# Altium PCB Tele.PcbDoc
Units mm, origin at the board's own origin, x right, y up, seen from the top; angles counter-clockwise.
Board outline 120 x 50 mm, 2 copper layers (Top Layer, Bottom Layer); 39 components, 47 nets, 209 pads, 64 vias.
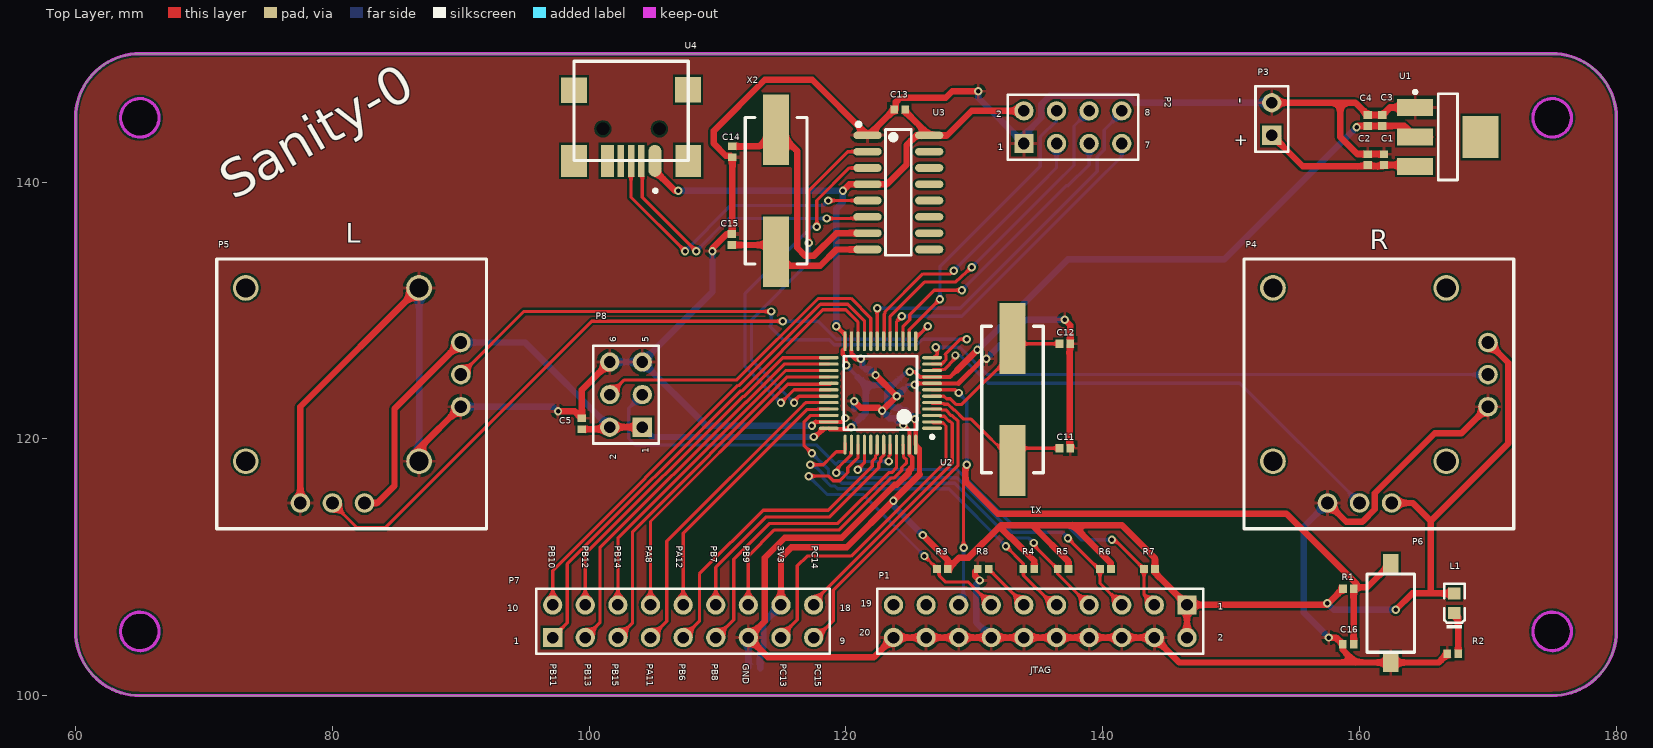
[diagram p0: Top Layer view]
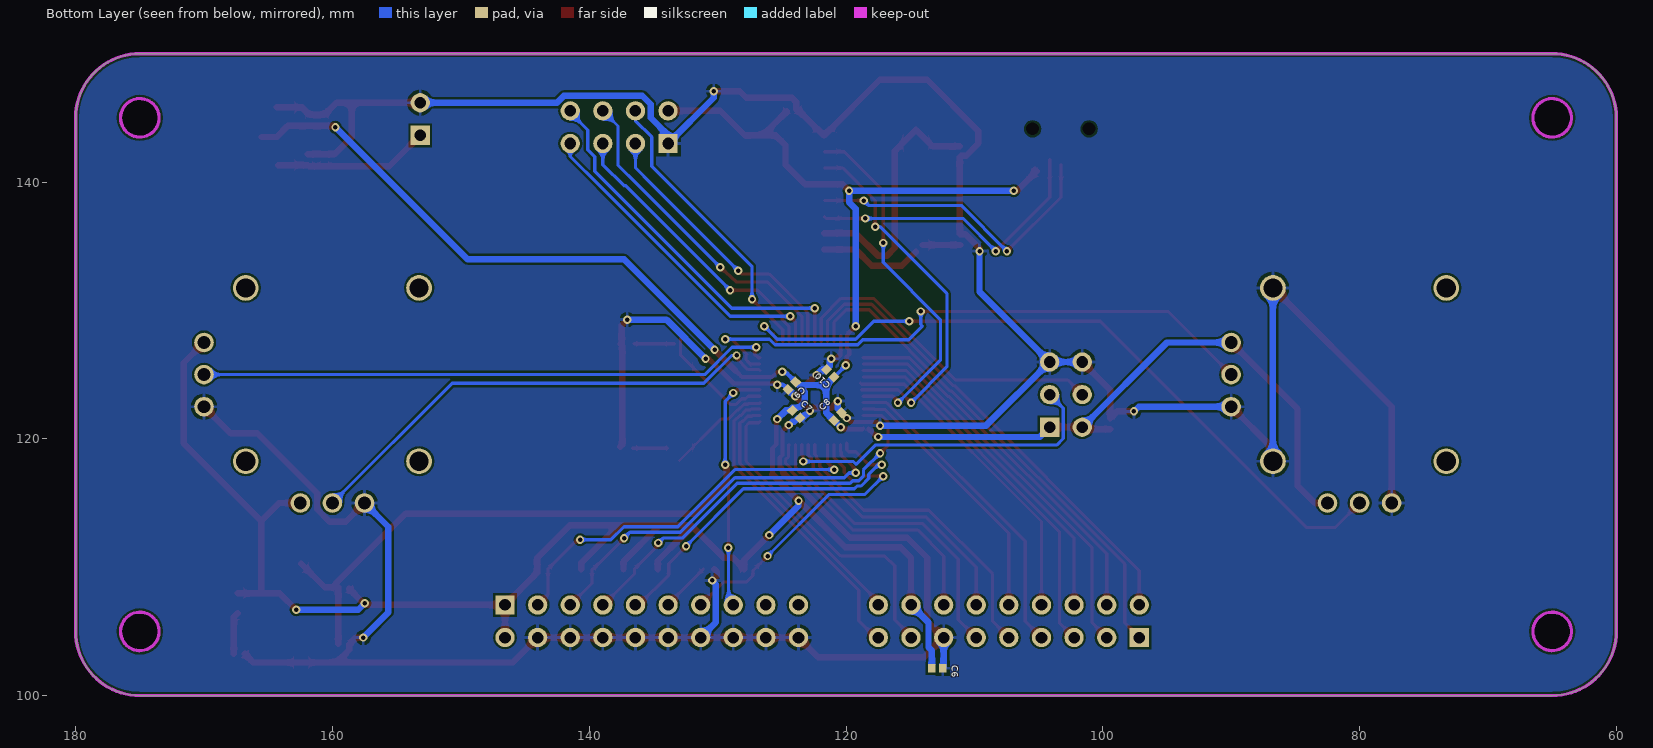
[diagram p1: Bottom Layer view, seen from below]

## Layer stack, top to bottom
Top Solder: solder mask 0.0102, Solder Resist, Dk 3.5
Top Layer: signal copper 0.0356
Dielectric 1: dielectric 0.32, FR-4, Dk 4.8
Bottom Layer: signal copper 0.0356
Bottom Solder: solder mask 0.0102, Solder Resist, Dk 3.5

## Board outline
60,105 60,145 cw(c65,145) 65,150 175,150 cw(c175,145) 180,145 180,105 cw(c175,105) 175,100 65,100 cw(c65,105)
cut-out: 173.5,105 ccw(c175,105) 175,103.5 ccw(c175,105) 176.5,105 ccw(c175,105) 175,106.5 ccw(c175,105)
cut-out: 173.5,145 ccw(c175,145) 175,143.5 ccw(c175,145) 176.5,145 ccw(c175,145) 175,146.5 ccw(c175,145)
cut-out: 65,143.5 cw(c65,145) 63.5,145 cw(c65,145) 65,146.5 cw(c65,145) 66.5,145 cw(c65,145)
cut-out: 65,103.5 cw(c65,105) 63.5,105 cw(c65,105) 65,106.5 cw(c65,105) 66.5,105 cw(c65,105)

## Design rules (kind name [scope] priority, off if disabled: settings)
Clearance Clearance_1 [InPolygon] p1: gap=0.16
Clearance [All] p2: gap=0.16
PolygonConnect [All] p1: connectstyle=Relief reliefconductorwidth=0.254 reliefentries=4 polygonreliefangle="90 Angle" airgapwidth=0.254
RoutingVias [All] p1: holewidth=0.711 width=1.27 viastyle="Through Hole" minholewidth=0.711 minwidth=1.27 maxholewidth=0.711 maxwidth=1.27
SolderMaskExpansion [All] p1: expansion=0.102
Width [InNet('GND')] p1: maxlimit=0.5 minlimit=0.25 preferedwidth=0.5 minimp=50.000000 maximp=50.000000 favimp=50.000000
30 further rules are at their usual default settings.

## Components (designator, comment, footprint, x,y, rotation, side; value= is the part's Value field where it differs from the comment)
C1 "106" LC-0402 162.306,140.97 r90 top
C2 "104" LC-0402 161.036,140.97 r90 top
C3 "104" LC-0402 162.179,144.018 r90 top
C4 "106" LC-0402 161.036,144.018 r90 top
C5 "0.1uF" LC-0402 99.822,120.396 r90 top
C6 "104" LC-0402 113.665,101.727 r180 bottom
C7 "104" LC-0402 124.714,122.174 r225 bottom
C8 "104" LC-0402 120.904,120.904 r135 bottom
C9 "104" LC-0402 123.952,124.968 r315 bottom
C10 "104" LC-0402 120.396,124.841 r45 bottom
C11 "22pF" LC-0402 136.271,118.872 r0 top
C12 "22pF" LC-0402 136.271,127 r0 top
C13 "0.1uF" LC-0402 124.968,146.05 r180 top
C14 "22pF" LC-0402 110.744,143.129 r270 top
C15 "22pF" LC-0402 111.506,134.747 r90 top
C16 "104" LC-0402 159.893,104.394 r180 top
L1 "LED" 0603_LED_S1 167.386,107.188 r90 top
P1 "AUX" HDR2X9_CEN 97.155,104.521 r0 top
P2 "nRF24L01-Module" HDR2X4 133.858,143.002 r0 top
P3 "POWER" HDR1X2 153.162,143.637 r90 top
P4 "stick" Stick 160,125 r0 top
P5 "stick" Stick 80,125 r0 top
P6 "ResetKey" ResetKeyC5382 162.433,106.426 r90 top
P7 "JTAG" HDR2X10 146.558,107.061 r180 top
P8 "STSRT_UP" HDR2X3 104.14,120.904 r90 top
R1 "10K" Res-0402 159.131,108.331 r180 top
R2 "Res-0402" Res-0402 167.259,103.251 r0 top
R3 "10K" Res-0402 127.508,109.855 r0 top
R4 "10K" Res-0402 134.239,109.855 r0 top
R5 "10K" Res-0402 136.906,109.855 r0 top
R6 "10K" Res-0402 140.208,109.855 r0 top
R7 "10K" Res-0402 143.637,109.855 r0 top
R8 "4.7K" Res-0402 130.683,109.855 r0 top
U1 "AMS1117" AMS1117 166.878,143.51 r0 top
U2 "STM32F103C8T6" STM-LQFP48_L 122.682,123.571 r180 top
U3 "CH340G" LC-SOP-16_150mil 124.079,139.192 r270 top
U4 "miniUSB" miniUSB 104.14,145.796 r270 top
X1 "8M" LC-HC-49SMD 132.969,123.063 r270 top
X2 "12M" LC-HC-49SMD 114.554,139.319 r90 top

## Footprints (in the part's own frame and the unit in brackets; to place one, negate y for a bottom-side part, rotate by r counter-clockwise, add the part's x,y. Pads: shape width x height; smd on the part's side, far side on the other; paste and mask are expansions set on the pad)
0603_LED_S1 [mm]
  rect 0.93x0.98 smd: N(-0.77,0) P(0.77,0)
  silkscreen extent -1.98,-0.79 1.53,0.79, body extent -0.8,-0.4 0.8,0.4, height 0.6
AMS1117 [mm]
  rect 2.8x1.3 smd: 1(-2.55,2.3) 2(-2.55,0) 3(-2.55,-2.3)
  rect 2.8x3.3 smd: ""(2.55,0)
  Top Overlay keep-out lines w0.2: -0.75,-3.35 -0.75,3.35 0.75,3.35 0.75,-3.35 -0.75,-3.35
  silkscreen extent -2.67,-3.35 0.75,3.62
HDR1X2 [mm] "Connector; Header; 2 Position"
  rect 1.5x1.5 hole 0.9: 1(0,0)
  round 1.5 hole 0.9: 2(2.54,0)
  silkscreen extent -1.27,-1.27 3.81,1.27
HDR2X3 [mm] "Connector; Header; 3x2 Position"
  rect 1.5x1.5 hole 0.9: 1(0,0)
  round 1.5 hole 0.9: 2(0,2.54) 3(2.54,0) 4(2.54,2.54) 5(5.08,0) 6(5.08,2.54)
  silkscreen extent -1.27,-1.27 6.35,3.81
HDR2X4 [mm] "Connector; Header; 4x2 Position"
  rect 1.5x1.5 hole 0.9: 1(0,0)
  round 1.5 hole 0.9: 2(0,2.54) 3(2.54,0) 4(2.54,2.54) 5(5.08,0) 6(5.08,2.54) 7(7.62,0) 8(7.62,2.54)
  silkscreen extent -1.27,-1.27 8.89,3.81
HDR2X9_CEN [mm] "Connector; Header; 9x2 Position"
  rect 1.5x1.5 hole 0.9: 1(0,0)
  round 1.5 hole 0.9: 2(2.54,0) 3(5.08,0) 4(7.62,0) 5(10.16,0) 6(12.7,0) 7(15.24,0) 8(17.78,0) 9(20.32,0) 10(0,2.54) 11(2.54,2.54) 12(5.08,2.54) 13(7.62,2.54) 14(10.16,2.54) 15(12.7,2.54) 16(15.24,2.54) 17(17.78,2.54) 18(20.32,2.54)
  silkscreen extent -1.27,-1.27 21.59,3.81
HDR2X10 [mm] "Connector; Header; 10x2 Position"
  rect 1.5x1.5 hole 0.9: 1(0,0)
  round 1.5 hole 0.9: 2(0,2.54) 3(2.54,0) 4(2.54,2.54) 5(5.08,0) 6(5.08,2.54) 7(7.62,0) 8(7.62,2.54) 9(10.16,0) 10(10.16,2.54) 11(12.7,0) 12(12.7,2.54) 13(15.24,0) 14(15.24,2.54) 15(17.78,0) 16(17.78,2.54) 17(20.32,0) 18(20.32,2.54) 19(22.86,0) 20(22.86,2.54)
  silkscreen extent -1.27,-1.27 24.13,3.81
LC-0402 [mm]
  rect 0.6x0.65 smd mask+0.051: 0(1.2,0.4) 1(0.35,0.4)
LC-HC-49SMD [mm]
  rect 5.5x2 smd: 0(4.75,0) 1(-4.75,0)
  silkscreen extent -5.7,-2.4 5.7,2.4, body extent -6.7,-2.46 6.7,2.44, height 4
LC-SOP-16_150mil [mm]
  oval 0.6x2.2 smd: 1(-4.445,-2.4) 2(-3.175,-2.4) 3(-1.905,-2.4) 4(-0.635,-2.4) 5(0.635,-2.4) 6(1.905,-2.4) 7(3.175,-2.4) 8(4.445,-2.4) 9(4.445,2.4) 10(3.175,2.4) 11(1.905,2.4) 12(0.635,2.4) 13(-0.635,2.4) 14(-1.905,2.4) 15(-3.175,2.4) 16(-4.445,2.4)
  silkscreen extent -5.45,-3.25 4.9,1
miniUSB [mm]
  oval 2.5x1 smd: 1(4.149,0.975)
  rect 2.5x0.5 smd: 2(4.149,-0.075) 3(4.149,-0.875) 4(4.149,-1.675)
  rect 2.5x1 smd: 5(4.149,-2.725)
  rect 2x2 smd: 6(-1.397,3.556) 6(-1.351,-5.325)
  rect 2.5x2 smd: 6(4.149,3.575) 6(4.149,-5.325)
  round 0 hole 1: ""(1.649,1.325) ""(1.649,-3.075)
  Top Overlay keep-out lines w0.254: -3.601,-4.553 -3.601,3.575 4.124,3.575 4.124,-5.325 -1.351,-5.325 -3.601,-5.325 -3.601,-4.275
  silkscreen extent -3.6,-5.33 6.6,3.57
Res-0402 [mm]
  rect 0.6x0.65 smd mask+0.051: 0(0.425,0) 1(-0.425,0)
ResetKeyC5382 [mm]
  rect 1.5x1.2 smd: 0(-3.85,0) 1(3.85,0)
  silkscreen extent -3.05,-1.85 3.05,1.85
Stick [mm]
  round 1.524 hole 1: 1(10,2.5) 2(10,0) 3(10,-2.5) 4(-2.5,-10) 5(0,-10) 6(2.5,-10)
  round 2 hole 1.5: ""(-6.75,-6.75) ""(-6.75,6.75) ""(6.75,-6.75) ""(6.75,6.75)
  silkscreen extent -9,-12 12,9
STM-LQFP48_L [mm] "QFP, 48-Leads, Body 7x7mm, Pitch 0.5mm, IPC High Density"
  oval 1.55x0.25 smd: 1(-4.025,2.75) 2(-4.025,2.25) 3(-4.025,1.75) 4(-4.025,1.25) 5(-4.025,0.75) 6(-4.025,0.25) 7(-4.025,-0.25) 8(-4.025,-0.75) 9(-4.025,-1.25) 10(-4.025,-1.75) 11(-4.025,-2.25) 12(-4.025,-2.75) 25(4.025,-2.75) 26(4.025,-2.25) 27(4.025,-1.75) 28(4.025,-1.25) 29(4.025,-0.75) 30(4.025,-0.25) 31(4.025,0.25) 32(4.025,0.75) 33(4.025,1.25) 34(4.025,1.75) 35(4.025,2.25) 36(4.025,2.75)
  oval 0.25x1.55 smd: 13(-2.75,-4.025) 14(-2.25,-4.025) 15(-1.75,-4.025) 16(-1.25,-4.025) 17(-0.75,-4.025) 18(-0.25,-4.025) 19(0.25,-4.025) 20(0.75,-4.025) 21(1.25,-4.025) 22(1.75,-4.025) 23(2.25,-4.025) 24(2.75,-4.025) 37(2.75,4.025) 38(2.25,4.025) 39(1.75,4.025) 40(1.25,4.025) 41(0.75,4.025) 42(0.25,4.025) 43(-0.25,4.025) 44(-0.75,4.025) 45(-1.25,4.025) 46(-1.75,4.025) 47(-2.25,4.025) 48(-2.75,4.025)
  silkscreen extent -4.15,-2.85 2.85,3.55, body extent -3.5,-3.5 3.5,3.5, height 1.6

## Part data
C1 C2 C3 C4 C5 C6 C7 C8 C9 C10 C11 C12 C13 C14 C15 C16: library part Cap-0402
P1: library part "Header 9X2A", "Header, 9-Pin, Dual row"
P2: library part "Header 4X2", "Header, 4-Pin, Dual row"
P3: library part "Header 2", "Header, 2-Pin"
P6: library part ResetKey_C5382
P7: library part "Header 10X2", "Header, 10-Pin, Dual row"
P8: library part "Header 3X2", "Header, 3-Pin, Dual row"
R1 R3 R4 R5 R6 R7 R8: library part Res-0402
U2: "ARM Cortex-M3 32-bit MCU, 64 KB Flash, 20 KB Internal RAM, 37 I/Os, 48-pin LQFP, -40 to 85 degC, Tray"
X1 X2: library part 49SMD

## Via types
v1: diameter 0.65, hole 0.35, Top Layer to Bottom Layer, tented both sides, 64 vias

## Nets (pads, with @x,y where several pads share a name; then routed paths per layer and width w, separated by ;. In a path a pad name is that pad's centre, name@x,y a point inside that pad or via, vN(x,y) a via of type N, cw(c..) or ccw(c..) an arc to the next point about the centre after c; other vN are vias at no path point)
3.7V-LIPO2S: C1.1 C2.1 P3.1 U1.3 | length 12
  Top Layer w0.5: P3.1 155.575,141.224 C1.1@161.81,141.224 ; C1.1 U1.3@164.218,141.32
3V3: C3.1 C4.1 C5.1 C6.1 C7.1 C8.1 C9.1 C10.1 C13.1 L1.P P1.17 P2.2 P4.1 P4.6 P5.1 P5.6 P7.1 P7.2 P8.1 P8.2 R1.0 R3.0 R4.0 R5.0 R6.0 R7.0 U1.2 U2.9 U2.24 U2.36 U2.48 U3.4 U3.16 U4.1 | length 287.4
  Top Layer w0.3: U2.36 U2.36@118.721,120.757 ; v1(119.253,128.778) 119.932,128.099 U2.24 119.932,127.088 119.761,126.917 ; 119.761,126.575 119.932,126.404 ; v1@120.249,120.757 v1@120.313,120.821 ; v1(124.968,125.222) 125.349,125.222 125.75,124.821 U2.9 128.123,124.821 128.651,125.349
  Top Layer w0.32: v1(125.349,121.539) 125.432,121.456 U2.48 125.73,119.248
  Top Layer w0.35: v1(117.475,120.142) 117.602,120.142 U2.36@118.237,120.777 ; U2.36@118.721,120.757 v1@120.249,120.757 ; 119.761,126.575 119.761,126.917 ; v1@119.932,125.813 119.932,126.404
  Top Layer w0.4: 125.73,117.221 125.73,119.248
  Top Layer w0.5: P5.6 83.5,115 84.836,116.336 84.836,122.336 P5.1 ; C5.1 101.442,120.746 P8.2 P8.1 ; U4.1@105.283,140.97 105.156,140.843 106.68,139.319 v1(106.934,139.319) ; P1.17 114.935,110.744 115.749,111.558 120.067,111.558 v1(123.698,115.189) 125.73,117.221 ; v1(119.761,139.319) 120.269,139.827 U3.4 123.19,139.827 124.714,141.351 124.714,142.875 125.476,143.637 U3.16 ; C13.1@124.618,145.498 U3.16 ; v1(125.984,112.508) 127.933,110.559 R3.0 128.829,110.751 129.547,110.751 131.953,113.157 ; 128.651,125.349 v1(130.238,126.936) ; P2.2 129.794,145.542 127.889,143.637 U3.16 ; 134.62,113.157 137.331,110.446 R5.0 ; R4.0 134.664,110.498 132.774,112.388 132.722,112.388 131.953,113.157 ; R6.0 140.633,110.319 137.668,113.284 ; P7.2 P7.1 ; R1.0 157.436,107.061 P7.1 ; v1@159.862,144.368 C4.1 C3.1 163.47,144.368 U1.2 U1.2@165.518,143.51 ; P4.6 164.146,115 165.481,113.665 ; v1(162.814,106.68) 164.092,107.958 L1.P ; 165.546,108.023 165.546,113.603 171.577,119.634 171.577,125.923 P4.1 ; 131.953,113.157 132.08,113.284 137.668,113.284 ; 137.668,113.284 141.478,113.284 144.062,110.7 R7.0 144.062,109.557 P7.1
  Bottom Layer w0.3: v1(120.015,125.73) 120.672,125.073 ; v1(120.396,120.904) C8.1@120.926,121.434 ; C9.1 124.701,125.222 v1(124.968,125.222)
  Bottom Layer w0.5: P5.1 95.004,127.5 P8.2 ; P8.1 104.902,120.142 v1(117.475,120.142) ; v1(106.934,139.319) 110.972,139.319 110.965,139.312 v1@119.754,139.312 ; C6.1 113.315,103.512 113.575,103.772 113.575,105.701 P1.17 ; v1(119.253,128.778) 119.253,137.922 119.761,138.43 v1(119.761,139.319) ; C10.1 121.539,124.193 ; C8.1 121.539,122.034 121.539,124.193 ; v1(123.698,115.189) 123.698,114.794 v1(125.984,112.508) ; C9.1 123.672,124.193 ; v1(125.349,121.539) 124.679,122.209 C7.1 124.184,122.435 123.788,122.435 123.743,122.48 123.594,122.48 123.197,122.877 123.197,123.63 123.317,123.75 123.317,123.838 123.672,124.193 ; v1(130.238,126.936) 137.287,133.985 149.479,133.985 v1(159.766,144.272) ; v1(157.48,107.188) 157.988,106.68 v1(162.814,106.68) ; 121.539,124.193 123.672,124.193
BOOT0: P8.3 U2.44 | length 26.4
  Top Layer w0.25: v1(123.317,118.237) 123.344,118.264 123.344,118.645 123.444,118.745 U2.44@123.444,119.534
  Bottom Layer w0.25: P8.3 103.085,122.389 103.085,120.028 103.601,119.512 117.724,119.512 119.213,118.023 119.421,118.232 119.502,118.232 119.507,118.237 v1(123.317,118.237)
BOOT1: P8.4 U2.20 | length 25.9
  Top Layer w0.25: P8.4 102.743,124.587 111.506,124.587 117.856,130.937 120.396,130.937 121.932,129.401 U2.20
CPU_RX: U2.31 U3.2 | length 28.6
  Top Layer w0.25: v1(115.951,122.809) 115.951,122.936 116.336,123.321 U2.31
  Top Layer w0.254: v1(117.094,135.255) 117.094,139.319 120.142,142.367 U3.2
  Bottom Layer w0.254: v1(115.951,122.809) 112.649,126.111 112.649,129.291 117.094,133.736 v1(117.094,135.255)
CPU_TX: U2.30 U3.3 | length 28.7
  Top Layer w0.25: v1(114.935,122.809) 115.947,123.821 U2.30@118.784,123.821
  Top Layer w0.254: v1(117.729,136.525) 117.729,138.562 120.264,141.097 U3.3
  Bottom Layer w0.254: v1(114.935,122.809) 112.141,125.603 112.141,131.323 117.343,136.525 v1(117.729,136.525)
D+: U3.5 U4.3 | length 24.3
  Top Layer w0.254: U4.3@103.251,141.351 103.251,138.835 v1(107.466,134.62) ; v1(118.618,138.557) U3.5
  Bottom Layer w0.254: v1(107.466,134.62) 111.022,138.176 118.237,138.176 v1(118.618,138.557)
D-: U3.6 U4.2 | length 23.3
  Top Layer w0.254: U4.2@104.14,141.732 104.14,138.811 v1(108.331,134.62) ; v1(118.491,137.16) 121.552,137.16 U3.6
  Bottom Layer w0.254: v1(108.331,134.62) 110.871,137.16 v1(118.491,137.16)
GND: C1.0 C2.0 C3.0 C4.0 C5.0 C6.0 C7.0 C8.0 C9.0 C10.0 C11.0 C12.0 C13.0 C14.0 C15.0 C16.0 P1.7 P2.1 P3.2 P4.3 P4.4 P5.3 P5.4 P5.@86.75,118.25 P5.@86.75,131.75 P6.0 P7.4 P7.6 P7.8 P7.10 P7.12 P7.14 P7.16 P7.18 P7.20 P8.5 P8.6 R2.1 R8.1 U1.1 U2.8 U2.23 U2.35 U2.47 U3.1 | length 330.7
  Top Layer w0.3: 117.638,121.321 U2.35 119.639,121.321 v1(119.937,121.619) ; U2.23@120.396,126.873 120.437,126.832 120.437,126.578 120.512,126.503 ; U2.23@120.412,126.873 U2.23@120.412,128.016 ; v1(125.349,124.206) 125.464,124.321 U2.8 128.766,124.321
  Top Layer w0.32: v1(124.46,121.071) 124.932,120.599 U2.47 124.952,119.526 124.952,118.747 125.161,118.538 125.161,117.795 125.095,117.729
  Top Layer w0.35: v1(117.348,121.031) 117.638,121.321
  Top Layer w0.4: 128.766,124.321 130.683,126.238 v1(130.937,126.238)
  Top Layer w0.45: 120.512,126.503 120.777,126.238 v1(121.158,126.238)
  Top Layer w0.5: P5.4 77.5,122.5 P5.@86.75,131.75 ; P5.@86.75,118.25 86.75,119.25 P5.3 ; v1(97.574,122.136) 98.882,122.136 C5.0 99.422,123.806 P8.6 ; v1(109.601,134.62) 109.601,134.837 110.711,135.947 C15.0 ; C15.0@111.144,135.985 C14.0 111.024,142.049 110.641,142.049 109.688,143.002 109.688,143.978 113.665,147.955 117.361,147.955 U3.1 ; v1(120.65,122.936) 121.158,122.428 122.555,122.428 v1(122.809,122.174) v1(123.952,123.317) v1(122.301,124.968) ; U3.1@121.755,143.637 C13.0 123.888,145.65 123.888,146.24 124.206,146.558 127.762,146.558 128.27,147.066 v1(130.302,147.066) ; 125.095,117.729 124.88,117.514 124.88,117.336 123.964,116.42 123.786,116.42 119.669,112.303 115.224,112.303 113.665,110.744 113.665,105.791 P1.7 113.919,102.997 122.174,102.997 P7.20 P7.18 P7.16 P7.14 P7.12 P7.10 P7.8 P7.6 P7.4 145.963,102.576 159.679,102.576 ; R8.1 130.048,109.645 130.048,109.347 v1(130.429,108.966) ; v1(137.033,129.286) 137.471,128.848 C12.0 ; C12.0@137.565,127.4 137.414,127.249 137.414,119.55 C11.0@137.572,119.392 ; P3.2 158.496,146.177 ; P4.4 158.962,113.538 160.224,113.538 161.192,114.506 161.192,115.768 165.862,120.438 167.938,120.438 P4.3 ; v1(157.607,104.521) 158.166,104.521 C16.0 158.693,103.562 159.679,102.576 ; C1.0 C2.0 159.836,142.17 158.496,143.51 158.496,146.177 ; U1.1 162.371,145.81 C3.0 C4.0 159.677,146.177 158.496,146.177 ; R2.1 166.159,102.576 P6.0 159.679,102.576
  Bottom Layer w0.3: C9.0 124.887,124.206 v1(125.349,124.206)
  Bottom Layer w0.35: v1@119.922,121.619 v1(119.937,121.619)
  Bottom Layer w0.5: P5.@86.75,118.25 P5.@86.75,131.75 ; P5.3 97.21,122.5 v1(97.574,122.136) ; P8.6 P8.5 ; v1(109.601,134.62) 109.601,131.445 P8.5 ; C6.0@112.395,102.197 P1.7 ; v1(117.348,121.031) 109.093,121.031 P8.5 ; 120.65,122.347 v1(120.65,122.936) ; v1(121.158,126.238) 121.273,126.123 121.273,125.661 ; C10.0 121.862,125.407 v1(122.301,124.968) ; v1(122.809,122.174) 123.375,121.608 C7.0 123.752,121.608 124.023,121.337 124.194,121.337 v1(124.46,121.071) ; v1(123.952,123.317) C9.0@124.472,123.837 ; v1(130.302,147.066) 130.302,146.558 P2.1 133.858,143.637 135.218,144.997 135.218,146.068 135.872,146.722 141.967,146.722 142.512,146.177 P3.2 ; v1(130.429,108.966) 130.138,108.675 130.138,105.701 P7.14 ; v1(130.937,126.238) 133.985,129.286 v1(137.033,129.286) ; P4.4 155.657,113.157 155.657,106.471 v1(157.607,104.521)
JNRST: P7.3 R7.1 U2.40 | length 30.8
  Top Layer w0.254: v1(120.904,117.602) 121.432,118.13 U2.40 ; v1(140.716,112.141) 140.926,112.141 R7.1 143.212,107.867 P7.3
  Bottom Layer w0.254: v1(120.904,117.602) 128.651,117.602 133.096,113.157 137.292,113.157 138.308,112.141 v1(140.716,112.141)
JTCK: P7.9 R4.1 U2.37 | length 28
  Top Layer w0.254: v1(117.221,117.983) 118.232,117.983 118.872,118.623 ; 118.938,118.679 119.258,118.999 119.785,118.999 119.932,119.146 U2.37@119.932,119.673 ; v1(132.461,111.633) 133.814,110.28 133.814,109.391 136.144,107.061 P7.9
  Bottom Layer w0.254: v1(117.221,117.983) 117.475,117.983 118.231,117.227 118.231,116.925 118.83,116.326 119.132,116.326 119.356,116.102 127.992,116.102 v1(132.461,111.633)
JTDI: P7.5 R6.1 U2.38 | length 29.8
  Top Layer w0.25: v1(119.253,117.348) 119.253,117.609 120.362,118.718 120.362,118.965 120.432,119.035 U2.38
  Top Layer w0.254: v1(137.287,112.268) 139.7,109.855 R6.1 139.783,108.756 P7.5
  Bottom Layer w0.254: v1(119.253,117.348) 119.761,117.348 120.139,116.97 128.648,116.97 132.895,112.723 136.832,112.723 v1(137.287,112.268)
JTDO: P7.13 R3.1 U2.39 | length 24.6
  Top Layer w0.25: v1(117.094,117.094) 118.644,117.094 119,116.738 119.506,116.738 120.142,117.374 120.142,117.756 120.745,118.359 120.772,118.359 120.932,118.519 U2.39 ; v1(126.111,110.871) R3.1@127.083,109.899 ; R3.1 R3.1@127.083,109.899 ; P7.13 129.54,108.839 127.762,108.839 127.254,109.347 127.254,109.728 R3.1@127.083,109.899
  Bottom Layer w0.25: v1(117.094,117.094) 118.518,115.67 121.312,115.67 v1(126.111,110.871)
JTMS: P7.7 R5.1 U2.34 | length 31.9
  Top Layer w0.25: v1(117.348,118.872) 116.718,119.502 116.718,121.292 117.247,121.821 U2.34 ; v1(134.62,111.887) 134.62,111.716 R5.1 136.481,109.47 P7.7@138.89,107.061
  Bottom Layer w0.25: v1(117.348,118.872) 117.348,118.87 118.643,117.575 118.643,117.095 119,116.738 119.48,116.738 119.68,116.538 128.469,116.538 132.739,112.268 134.239,112.268 v1(134.62,111.887)
LE: P5.2 U2.11 | length 47.4
  Top Layer w0.25: P5.2 94.921,129.921 v1(114.173,129.921) ; U2.11 127.465,125.821 127.787,126.143 127.787,126.499 127.715,126.572 127.715,126.574 128.903,127.762 v1(129.413,127.762)
  Bottom Layer w0.25: v1(114.173,129.921) 114.173,128.905 114.046,128.778 115.113,127.711 118.693,127.711 119.074,127.33 125.528,127.33 125.96,127.762 v1(129.413,127.762)
LR: P5.5 U2.13 | length 56.5
  Top Layer w0.25: P5.5 81.915,113.085 84.129,113.085 100.203,129.159
  Top Layer w0.254: 100.203,129.159 v1(115.062,129.159) ; U2.13 125.432,127.845 v1(126.365,128.778)
  Bottom Layer w0.254: v1(115.062,129.159) 117.856,129.159 119.253,127.762 119.888,127.762 ; 120.015,127.762 119.888,127.762 ; v1(126.365,128.778) 125.349,127.762 119.888,127.762
NetC11_1: C11.1 U2.5 X1.0 | length 10.9
  Top Layer w0.254: U2.5 126.707,122.759 127.574,122.759 127.646,122.687 127.943,122.687 128.382,122.248 128.45,122.248 129.159,121.539 129.743,121.539 X1.0 ; X1.0@133.928,119.272 C11.1
NetC12_1: C12.1 U2.6 X1.1 | length 12.4
  Top Layer w0.254: U2.6 127.626,123.321 127.826,123.121 128.123,123.121 128.562,122.682 129.032,122.682 132.898,126.548 X1.1@132.898,127.813 ; X1.1@133.382,127.4 C12.1@136.494,127.4
NetC14_1: C14.1 U3.7 X2.0 | length 20.3
  Top Layer w0.254: 117.472,134.242 117.475,134.239
  Top Layer w0.5: C14.1 113.264,142.779 X2.0 116.205,142.418 116.205,134.869 116.832,134.242 117.472,134.242 ; 117.475,134.239 119.253,136.017 U3.7
NetC15_1: C15.1 U3.8 X2.1 | length 11
  Top Layer w0.5: C15.1 X2.1@114.026,135.097 ; X2.1 115.646,133.477 117.983,133.477 119.253,134.747 U3.8
NetL1_N: L1.N R2.0 | length 3.3
  Top Layer w0.5: L1.N 167.684,106.12 R2.0
NetP7_11: P7.11 R8.0 | length 3.9
  Top Layer w0.25: R8.0 P7.11@133.858,107.105
NRST: C16.1 P6.1 P7.15 R1.1 U2.7 | length 62.4
  Top Layer w0.254: U2.7 126.711,123.825 128.524,123.825 v1(128.778,123.571) ; v1(129.159,111.506) 129.159,117.729 v1(129.413,117.983) 129.413,116.586
  Top Layer w0.5: 129.413,116.586 131.826,114.173 154.305,114.173 159.791,108.687 159.543,108.439 C16.1@159.543,104.026 ; R1.1@159.806,108.439 160.596,108.439 P6.1
  Bottom Layer w0.254: P7.15 129.159,107.442 v1(129.159,111.506) ; v1(128.778,123.571) 129.413,122.936 v1(129.413,117.983)
PA8: P1.13 U2.29 | length 25.1
  Top Layer w0.254: P1.13 104.775,113.559 115.469,124.253 118.792,124.253 U2.29@118.872,124.333
PA11: P1.4 U2.32 | length 25.1
  Top Layer w0.254: P1.4 106.045,105.791 106.045,112.014 116.081,122.05 116.086,122.05 116.71,122.674 116.71,122.679 116.852,122.821 U2.32
PA12: P1.14 U2.33 | length 20.9
  Top Layer w0.254: P1.14 107.315,112.649 116.941,122.275 117.758,122.275 117.804,122.321 U2.33
PB6: P1.5 U2.42 | length 24.3
  Top Layer w0.254: P1.5 108.585,105.791 108.585,109.474 113.538,114.427 118.623,114.427 122.047,117.851 122.047,118.237 122.291,118.481 122.291,118.662 122.428,118.799 U2.42@122.428,119.546
PB7: P1.15 U2.43 | length 20.8
  Top Layer w0.254: P1.15 109.855,109.982 113.792,113.919 118.729,113.919 122.555,117.745 122.555,118.11 122.705,118.26 122.705,118.49 122.932,118.717 U2.43
PB8: P1.6 U2.45 | length 24.1
  Top Layer w0.254: P1.6 111.252,105.918 111.252,110.617 114.046,113.411 119.36,113.411 123.32,117.371 123.57,117.371 123.929,117.73 123.929,117.98 123.932,117.983 U2.45
PB9: P1.16 U2.46 | length 20.8
  Top Layer w0.254: P1.16 112.395,110.871 114.427,112.903 119.481,112.903 123.535,116.957 123.742,116.957 124.343,117.558 124.343,117.765 124.714,118.136 124.714,118.353 124.485,118.582 124.485,119.493 U2.46
PB10: P1.10 U2.21 | length 37.7
  Top Layer w0.254: P1.10 97.155,109.728 111.582,124.155 111.685,124.155 118.012,130.482 120.143,130.482 121.432,129.193 U2.21
PB11: P1.1 U2.22 | length 38.9
  Top Layer w0.254: P1.1 98.298,105.664 98.298,110.257 111.762,123.721 111.865,123.721 118.192,130.048 119.991,130.048 120.932,129.107 U2.22
PB12: P1.11 U2.25 | length 29.3
  Top Layer w0.254: P1.11 99.695,111.04 111.942,123.287 112.044,123.287 115.078,126.321 U2.25
PB13: P1.2 U2.26 | length 31.2
  Top Layer w0.254: P1.2 100.838,105.664 100.838,111.506 112.185,122.853 112.224,122.853 115.192,125.821 U2.26
PB14: P1.12 U2.27 | length 27
  Top Layer w0.254: P1.12 102.235,112.268 112.386,122.419 112.404,122.419 115.306,125.321 U2.27
PB15: P1.3 U2.28 | length 29
  Top Layer w0.254: P1.3 103.378,105.664 103.378,112.776 115.423,124.821 U2.28
PC13: P1.8 U2.2 | length 25
  Top Layer w0.254: P1.8 114.935,104.648 116.205,105.918 116.205,110.109 116.967,110.871 120.396,110.871 127.789,118.264 127.789,121 127.536,121.253 126.775,121.253 U2.2
PC14: P1.18 U2.3 | length 20.4
  Top Layer w0.254: P1.18 117.475,107.315 128.27,118.11 128.27,121.2 128.09,121.38 128.023,121.38 127.65,121.753 127.353,121.753 127.285,121.821 U2.3
PC15: P1.9 U2.4 | length 24
  Top Layer w0.254: P1.9@117.582,104.414 118.999,105.831 118.999,108.204 128.725,117.93 128.725,121.359 128.27,121.814 128.202,121.814 127.763,122.253 127.467,122.253 127.399,122.321 U2.4
RA: P4.5 U2.10 | length 38.7
  Top Layer w0.25: U2.10 126.777,125.391 127.643,125.391 128.524,126.272 v1(128.524,126.492)
  Bottom Layer w0.25: v1(128.524,126.492) 128.905,126.492 131.077,124.32 150.68,124.32 P4.5
RC_CE: P2.3 U2.18 | length 22.2
  Top Layer w0.254: U2.18 122.985,127.649 122.985,129.72 123.037,129.771 123.037,129.89 125.989,132.842 128.143,132.842 v1(128.397,133.096)
  Bottom Layer w0.25: 135.128,139.827 136.398,141.097 P2.3
  Bottom Layer w0.254: v1(128.397,133.096) 135.128,139.827
RC_CLK: P2.5 U2.15 | length 22.6
  Top Layer w0.254: U2.15 124.432,128.745 124.965,129.278 124.965,129.664 126.873,131.572 v1(129.032,131.572)
  Bottom Layer w0.25: 137.287,139.7 138.938,141.351 P2.5
  Bottom Layer w0.254: v1(129.032,131.572) 137.16,139.7
RC_INT: P2.8 U2.19 | length 29.6
  Top Layer w0.254: v1(122.428,130.175) 122.428,127.6 U2.19
  Top Layer w0.5: P2.8@141.478,145.415 P2.8
  Bottom Layer w0.25: 137.541,138.811 139.573,140.843 139.573,141.968 140.118,142.513 140.118,144.055 P2.8@141.478,145.415
  Bottom Layer w0.254: v1(122.428,130.175) 128.905,130.175 129.593,130.863 137.541,138.811
RC_MISO: P2.7 U2.16 | length 25.4
  Top Layer w0.254: U2.16 123.932,129.139 v1(124.333,129.54)
  Bottom Layer w0.25: 139.192,139.7 141.478,141.986 P2.7
  Bottom Layer w0.254: v1(124.333,129.54) 129.032,129.54 139.192,139.7
RC_MOSI: P2.6 U2.17 | length 25.8
  Top Layer w0.254: U2.17 123.432,129.533 126.111,132.212 128.529,132.212 v1(129.794,133.35)
  Bottom Layer w0.25: 136.271,139.827 137.758,141.314 137.758,144.362 P2.6
  Bottom Layer w0.254: v1(129.794,133.35) 136.271,139.827
RC_NSS: P2.4 U2.14 | length 22.7
  Top Layer w0.254: U2.14 124.932,128.488 v1(127.317,130.874)
  Bottom Layer w0.254: v1(127.317,130.874) 127.317,133.413 135.128,141.224 135.128,143.51 136.398,144.78 P2.4
RT: P4.2 U2.12 | length 44.9
  Top Layer w0.25: U2.12 126.856,126.321 127.111,126.576 v1@127.111,127.127
  Bottom Layer w0.25: v1(127,127.127) 128.878,127.127 131.005,125 P4.2
pads on no net: P4. P5.@73.25,118.25 P5.@73.25,131.75 P7.17 P7.19 U1. U2.1 U2.41 U3.9 U3.10 U3.11 U3.12 U3.13 U3.14 U3.15 U4. U4.4 U4.5 U4.6

## Polygon pours and split planes (outlines as drawn)
GND on Bottom Layer "Bottom Layer-GND" (solid, remove dead copper, pour order 7): 55.753,154.813 57.15,153.416 57.15,99.06 183.388,99.06 186.055,101.727 182.245,105.537 182.245,153.924
GND on Top Layer "Bottom Layer-GND" (solid, remove dead copper, pour order 9): 55.626,152.4 55.626,99.06 61.595,93.091 65.532,97.028 184.15,97.028 184.15,151.384 181.61,153.924

## Keep-outs
Keep-Out Layer:
  circle w0.254: c175,105 r1.5
  circle w0.254: c175,145 r1.5
  circle w0.254: c65,105 r1.5
  circle w0.254: c65,145 r1.5
  lines w0.254: 60,105 ccw(c65,105) 65,100 175,100 ccw(c175,105) 180,105 180,145 ccw(c175,145) 175,150 65,150 ccw(c65,145) 60,145 60,105

## Silkscreen, mask and mechanical layers (free items; w line width, h text height)
Top Overlay:
  text "-" at 150.368,146.558 h0.91 r270
  text "+" at 150.368,143.764 h0.91 r270
  text "Sanity-0" at 72.771,137.668 h5 r30
  text "L" at 81.026,135.255 h1.52
  text "R" at 160.782,134.747 h1.52
  text "PB10" at 96.855,111.681 h0.51 r270
  text "PB12" at 99.441,111.681 h0.51 r270
  text "PB14" at 101.981,111.681 h0.51 r270
  text "PA8" at 104.394,111.681 h0.51 r270
  text "PA12" at 106.761,111.681 h0.51 r270
  text "PB7" at 109.474,111.681 h0.51 r270
  text "PB9" at 112.014,111.681 h0.51 r270
  text "3V3" at 114.681,111.681 h0.51 r270
  text "PC14" at 117.348,111.681 h0.51 r270
  text "PB11" at 96.982,102.47 h0.51 r270
  text "PB13" at 99.649,102.47 h0.51 r270
  text "PB15" at 101.808,102.47 h0.51 r270
  text "PA11" at 104.475,102.47 h0.51 r270
  text "PB6" at 107.015,102.47 h0.51 r270
  text "PB8" at 109.555,102.47 h0.51 r270
  text "GND" at 111.968,102.47 h0.51 r270
  text "PC13" at 114.889,102.47 h0.51 r270
  text "PC15" at 117.556,102.47 h0.51 r270
  text "JTAG" at 134.366,101.727 h0.51

## Text inside footprints (layer, text, board x,y; h text height)
P1: Top Overlay "18" at 119.507,106.553 h0.5; Top Overlay "9" at 119.507,104.013 h0.5; Top Overlay "1" at 94.107,104.013 h0.5; Top Overlay "10" at 93.599,106.553 h0.5
P2: Top Overlay "8" at 143.256,145.161 h0.5; Top Overlay "7" at 143.256,142.621 h0.5; Top Overlay "1" at 131.826,142.494 h0.5; Top Overlay "2" at 131.699,145.034 h0.5
P7: Top Overlay "2" at 148.971,104.267 h0.5; Top Overlay "1" at 148.971,106.68 h0.5; Top Overlay "19" at 121.158,106.934 h0.5; Top Overlay "20" at 121.031,104.648 h0.5
P8: Top Overlay "1" at 104.648,118.872 h0.5 r90; Top Overlay "2" at 102.108,118.364 h0.5 r90; Top Overlay "5" at 104.648,127.508 h0.5 r90; Top Overlay "6" at 102.108,127.508 h0.5 r90